# EAGLE board tictactoe2 (EAGLE 6.4)
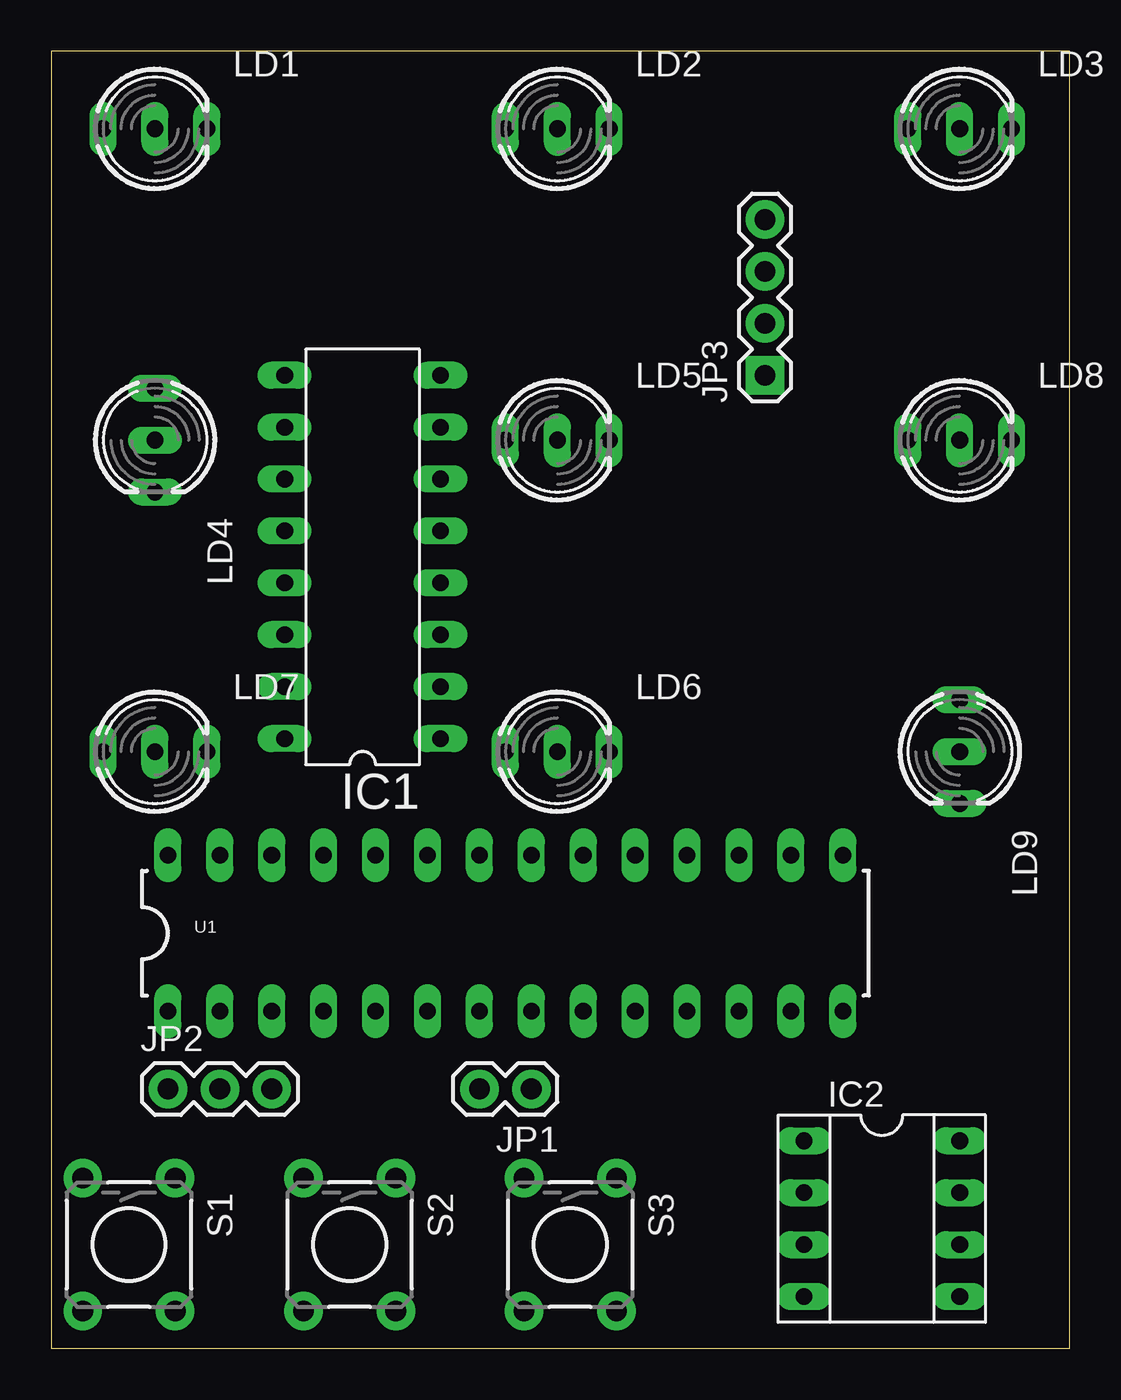
[diagram p0: board, top side]
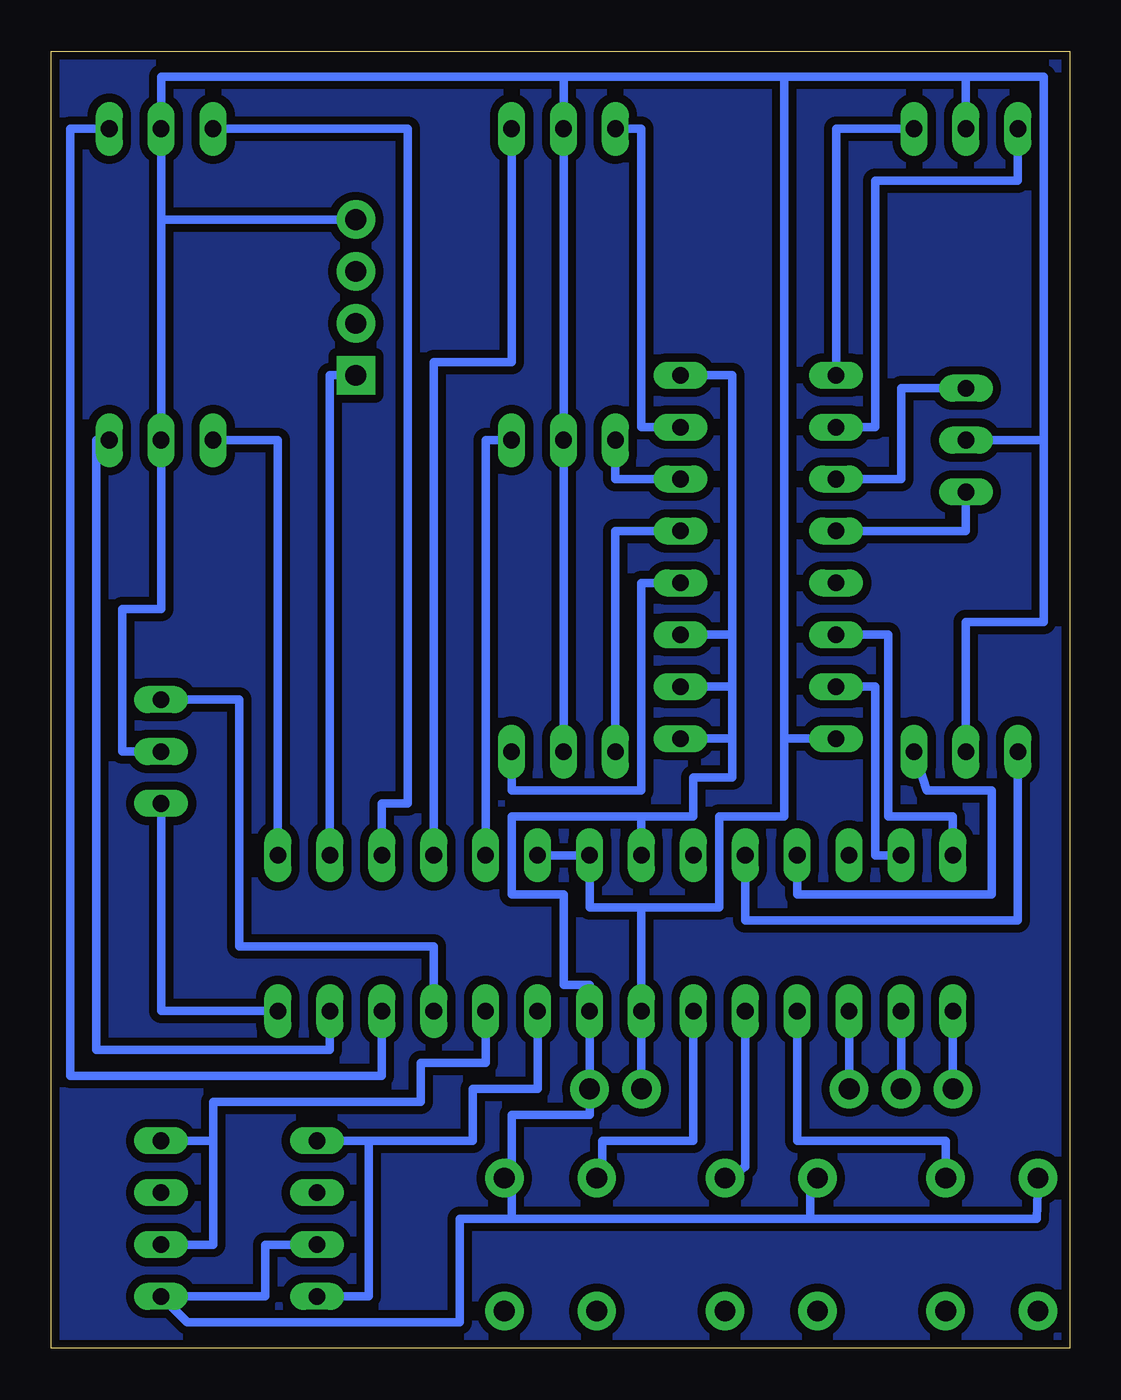
[diagram p1: board, bottom side, seen from below]

Size 49.84 x 63.49 mm. Coordinates in mm from the lower left corner, seen from the top.
Outline: 0,0 49.84,0 49.84,63.49 0,63.49 0,0
Copper layers (1*16): Top 0.035mm / dielectric 1.5mm / Bottom 0.035mm
Design rules "bastli": minimum track width 0.4mm, minimum drill 0.1mm, track to track 0.4mm, track to pad 0.4mm, pad to pad 0.4mm, via to via 0.4mm, smd to smd 0.4mm, copper to edge 0.4mm, drill to drill 0.4mm, minimum pad ring 10mil, minimum via ring 8mil, stop-mask expansion 4mil, vias tented up to drill 0mil, thermal gap 10mil

## Footprints (pad centres in the part's own frame; a part is rotated, then mirrored left to right if it is on the bottom)
DIL16 = drill 0.813 long: 1 -8.89,-3.81; 2 -6.35,-3.81; 3 -3.81,-3.81; 4 -1.27,-3.81; 5 1.27,-3.81; 6 3.81,-3.81; 7 6.35,-3.81; 8 8.89,-3.81; 9 8.89,3.81; 10 6.35,3.81; 11 3.81,3.81; 12 1.27,3.81; 13 -1.27,3.81; 14 -3.81,3.81; 15 -6.35,3.81; 16 -8.89,3.81
SOCKET-08 = drill 0.813 long: 1 -3.81,-3.81; 2 -1.27,-3.81; 3 1.27,-3.81; 4 3.81,-3.81; 5 3.81,3.81; 6 1.27,3.81; 7 -1.27,3.81; 8 -3.81,3.81
1X02 = drill 1.016 pad 1.88: 1 0,0; 2 2.54,0
1X03 = drill 1.016 pad 1.88: 1 0,0; 2 2.54,0; 3 5.08,0
1X04 = drill 1.016 pad 1.88 square: 1 0,0 | drill 1.016 pad 1.88: 2 2.54,0; 3 5.08,0; 4 7.62,0
DUOLED-C-5MM = drill 0.813 long: AR 2.54,0; AX -2.54,0; C 0,0
TACTILE-PTH = drill 1.016 pad 1.88: 1 -3.251,2.261; 2 3.251,2.261; 3 -3.251,-2.261; 4 3.251,-2.261
DIL28-3 = drill 0.813 long: 1 -16.51,-3.81; 2 -13.97,-3.81; 3 -11.43,-3.81; 4 -8.89,-3.81; 5 -6.35,-3.81; 6 -3.81,-3.81; 7 -1.27,-3.81; 8 1.27,-3.81; 9 3.81,-3.81; 10 6.35,-3.81; 11 8.89,-3.81; 12 11.43,-3.81; 13 13.97,-3.81; 14 16.51,-3.81; 15 16.51,3.81; 16 13.97,3.81; 17 11.43,3.81; 18 8.89,3.81; 19 6.35,3.81; 20 3.81,3.81; 21 1.27,3.81; 22 -1.27,3.81; 23 -3.81,3.81; 24 -6.35,3.81; 25 -8.89,3.81; 26 -11.43,3.81; 27 -13.97,3.81; 28 -16.51,3.81

## Placement (x,y rotation side)
IC1  PCF8574P  [DIL16]  15.24,38.73 90 top
IC2  [SOCKET-08]  40.64,6.35 270 top
JP1  M02PTH  [1X02]  23.49,12.7 180 top
JP2  [1X03]  5.71,12.7 0 top
JP3  [1X04]  34.93,47.62 90 top
LD1  [DUOLED-C-5MM]  5.08,59.69 0 top
LD2  [DUOLED-C-5MM]  24.76,59.69 0 top
LD3  [DUOLED-C-5MM]  44.45,59.69 0 top
LD4  [DUOLED-C-5MM]  5.08,44.45 270 top
LD5  [DUOLED-C-5MM]  24.76,44.45 0 top
LD6  [DUOLED-C-5MM]  24.76,29.21 0 top
LD7  [DUOLED-C-5MM]  5.08,29.21 0 top
LD8  [DUOLED-C-5MM]  44.45,44.45 0 top
LD9  [DUOLED-C-5MM]  44.45,29.21 270 top
S1  [TACTILE-PTH]  3.81,5.08 270 top
S2  [TACTILE-PTH]  14.61,5.08 270 top
S3  [TACTILE-PTH]  25.4,5.08 270 top
U1  ATMEGA328P_PDIP  [DIL28-3]  22.22,20.32 0 top

## Library data of the parts
IC1 = micro-philips; MPN: PCF8574PN; OC_FARNELL: 204020; OC_NEWARK: 11N8515
IC2 = ic-package
JP1-JP3 = SparkFun-Connectors
LD1-LD9 = led
S1-S3 = SparkFun-Electromechanical
U1 = SparkFun-DigitalIC

## Nets
GND: IC1.1 IC1.2 IC1.3 IC1.8 IC2.3 IC2.5 JP1.1 S1.3 S2.3 S3.1 U1.8 U1.22
N$1: JP2.1 U1.1
N$2: JP2.2 U1.2
N$3: JP2.3 U1.3
N$4: S1.1 U1.4
N$5: S2.1 U1.5
N$6: S3.3 U1.6
N$7: IC2.6 IC2.8 U1.10
N$8: IC2.1 IC2.4 U1.9
N$10: IC1.15 U1.27
N$11: IC1.14 U1.28
S$1: IC1.4 LD6.AR
S$2: IC1.6 LD5.AX
S$3: IC1.7 LD2.AX
S$4: IC1.12 LD4.AR
S$5: LD7.AR U1.25
S$6: LD5.AR U1.19
S$7: LD7.AX U1.24
S$8: IC1.11 LD4.AX
S$9: IC1.10 LD1.AX
S$10: LD3.AR U1.12
S$11: JP3.1 U1.16
S$12: LD8.AX U1.15
S$13: LD2.AR U1.18
S$14: LD3.AX U1.17
S$15: LD8.AR U1.13
S$16: LD9.AR U1.14
S$17: IC1.5 LD6.AX
S$18: IC1.9 LD1.AR
S$19: LD9.AX U1.11
VCC: IC1.16 JP1.2 JP3.4 LD1.C LD2.C LD3.C LD4.C LD5.C LD6.C LD7.C LD8.C LD9.C U1.7 U1.20 U1.21

## Tracks (layer width: path | path; a pad name or v marks a point on that pad's centre or on a via)
GND
  Bottom 0.406: S1.3 1.63,6.35 12.7,6.35 | 12.7,6.35 27.3,6.35 | 27.3,6.35 29.84,6.35 29.84,1.27 43.18,1.27 IC2.5 39.37,2.54 39.37,5.08 IC2.3 | S2.3 12.7,7.98 12.7,6.35 | IC1.8 16.51,47.62 16.51,34.92 | 16.51,34.92 IC1.3 | 16.51,29.84 16.51,32.38 | 16.51,32.38 16.51,34.92 | IC1.2 16.51,32.38 | IC1.1 16.51,29.84 | 16.51,29.84 16.51,27.94 18.41,27.94 18.41,26.04 20.95,26.04 | 20.95,26.04 27.3,26.04 27.3,22.22 24.76,22.22 24.76,17.78 23.49,17.78 U1.8 JP1.1 23.49,11.43 27.3,11.43 27.3,8.89 S3.1 27.3,7.62 27.3,6.35 | U1.22 20.95,26.04
N$1
  Bottom 0.406: U1.1 JP2.1
N$2
  Bottom 0.406: U1.2 JP2.2
N$3
  Bottom 0.406: U1.3 JP2.3
N$4
  Bottom 0.406: U1.4 13.34,10.16 6.07,10.16 S1.1
N$5
  Bottom 0.406: U1.5 15.88,8.89 16.87,8.26 S2.1
N$6
  Bottom 0.406: U1.6 18.41,10.16 22.86,10.16 22.86,8.89 S3.3
N$7
  Bottom 0.406: U1.10 28.57,13.97 31.75,13.97 31.75,12.07 41.91,12.07 41.91,10.16 | IC2.6 41.91,5.08 41.91,10.16 | 41.91,10.16 IC2.8
N$8
  Bottom 0.406: 34.29,10.16 34.29,2.54 IC2.4 | U1.9 26.04,12.7 29.21,12.7 29.21,10.16 34.29,10.16 | 34.29,10.16 IC2.1
N$10
  Bottom 0.406: U1.27 9.53,24.13 9.53,32.38 IC1.15
N$11
  Bottom 0.406: IC1.14 8.89,34.92 8.89,26.04 5.71,26.04 U1.28
S$1
  Bottom 0.406: IC1.4 20.95,37.46 20.95,27.3 27.3,27.3 LD6.AR
S$2
  Bottom 0.406: LD5.AX 22.22,42.55 IC1.6
S$3
  Bottom 0.406: IC1.7 20.95,45.09 20.95,59.69 LD2.AX
S$4
  Bottom 0.406: IC1.12 5.08,40 LD4.AR
S$5
  Bottom 0.406: U1.25 13.34,22.22 3.81,22.22 3.81,27.3 6.99,27.3 LD7.AR
S$6
  Bottom 0.406: LD5.AR 28.57,44.45 U1.19
S$7
  Bottom 0.406: U1.24 15.88,20.95 2.54,20.95 LD7.AX
S$8
  Bottom 0.406: IC1.11 8.26,42.55 8.26,46.99 LD4.AX
S$9
  Bottom 0.406: IC1.10 9.53,45.09 9.53,57.15 2.54,57.15 LD1.AX
S$10
  Bottom 0.406: U1.12 33.66,13.34 48.9,13.34 48.9,59.69 LD3.AR
S$11
  Bottom 0.406: U1.16 36.2,47.62 JP3.1
S$12
  Bottom 0.406: U1.15 38.73,44.45 LD8.AX
S$13
  Bottom 0.406: U1.18 31.11,48.26 27.3,48.26 LD2.AR
S$14
  Bottom 0.406: LD3.AX 32.39,59.69 32.39,26.67 33.66,26.67 U1.17
S$15
  Bottom 0.406: U1.13 36.2,14.61 47.62,14.61 47.62,44.45 LD8.AR
S$16
  Bottom 0.406: U1.14 44.45,16.51 LD9.AR
S$17
  Bottom 0.406: IC1.5 22.22,40 LD6.AX
S$18
  Bottom 0.406: IC1.9 11.43,59.69 LD1.AR
S$19
  Bottom 0.406: U1.11 31.11,19.68 40.64,19.68 40.64,31.75 LD9.AX
S$20
  pour Bottom: 0,63.5 50.16,63.5 50.16,0 0,0
VCC
  Bottom 0.406: U1.20 U1.21 23.49,21.59 20.95,21.59 | JP1.2 U1.7 20.95,21.59 | 13.97,29.84 13.97,26.04 17.14,26.04 17.14,21.59 20.95,21.59 | 13.97,29.84 IC1.16 | LD7.C 5.08,35.56 1.27,35.56 1.27,44.45 | 44.45,55.24 LD3.C 44.45,62.23 24.76,62.23 | 44.45,55.24 LD8.C 44.45,36.2 46.36,36.2 46.36,29.21 LD9.C | 5.08,62.23 LD1.C | 24.76,62.23 13.97,62.23 | 13.97,62.23 5.08,62.23 | 24.76,62.23 LD2.C LD5.C LD6.C | 13.97,29.84 13.97,62.23 | 1.27,44.45 LD4.C | JP3.4 44.45,55.24 | 1.27,44.45 1.27,62.23 5.08,62.23